# Altium PCB PCB_Propu2026.PcbDoc
Units mm, origin at the board's own origin, x right, y up, seen from the top; angles counter-clockwise.
Board outline 86.75 x 45 mm, 2 copper layers (Top Layer, Bottom Layer); 47 components, 27 nets, 139 pads, 3 vias.
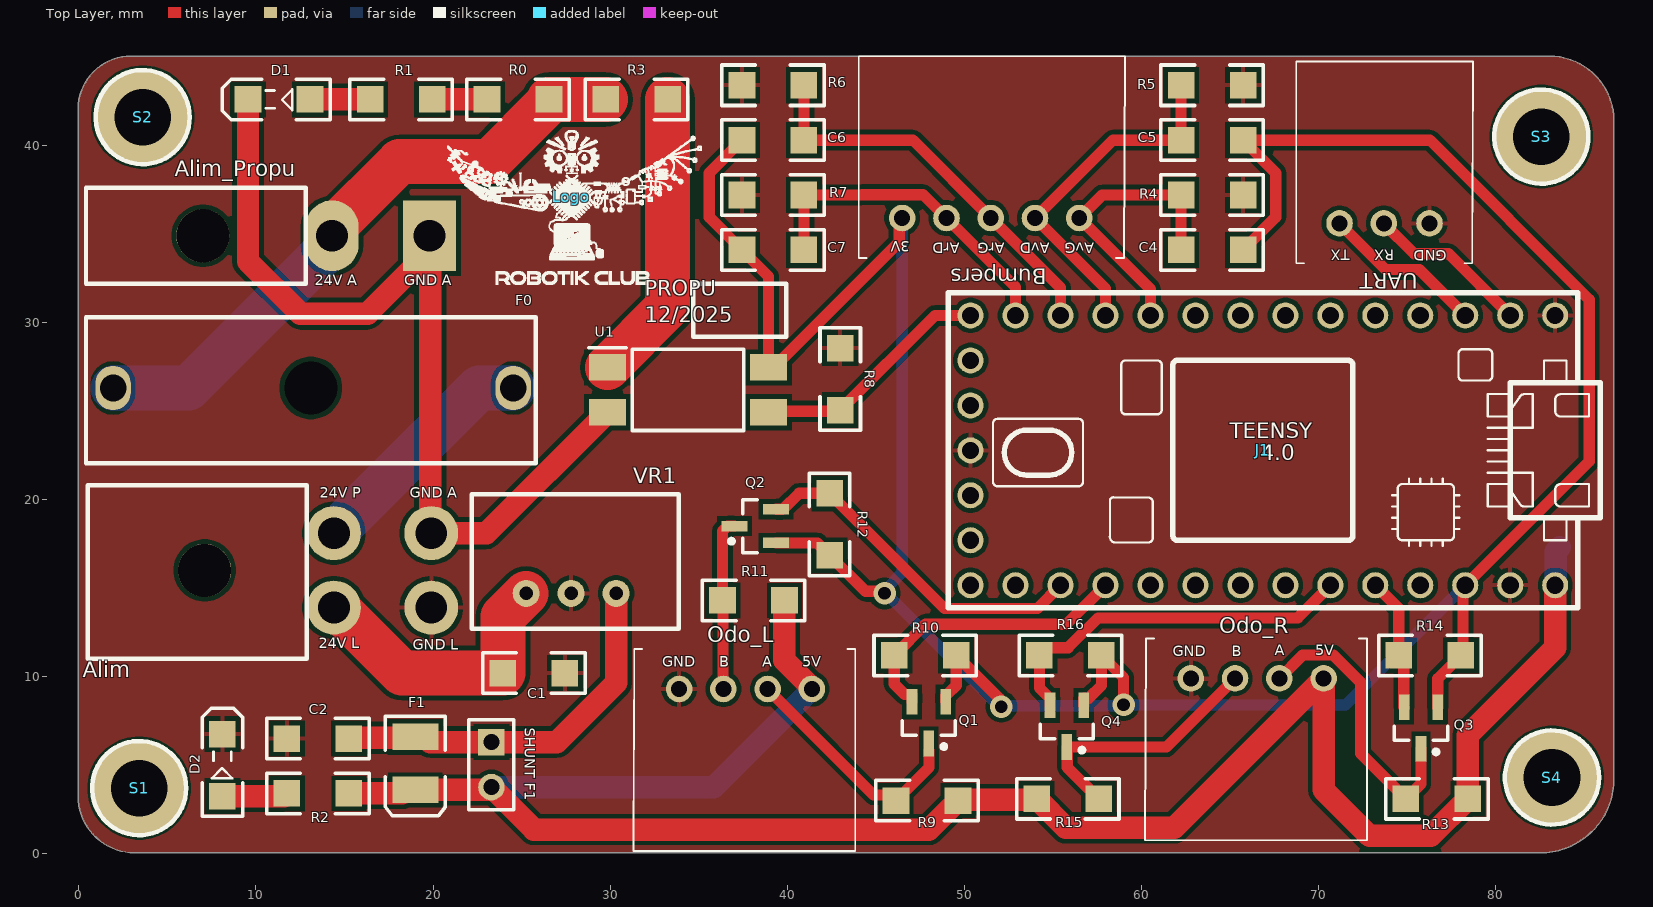
[diagram p0: Top Layer view]
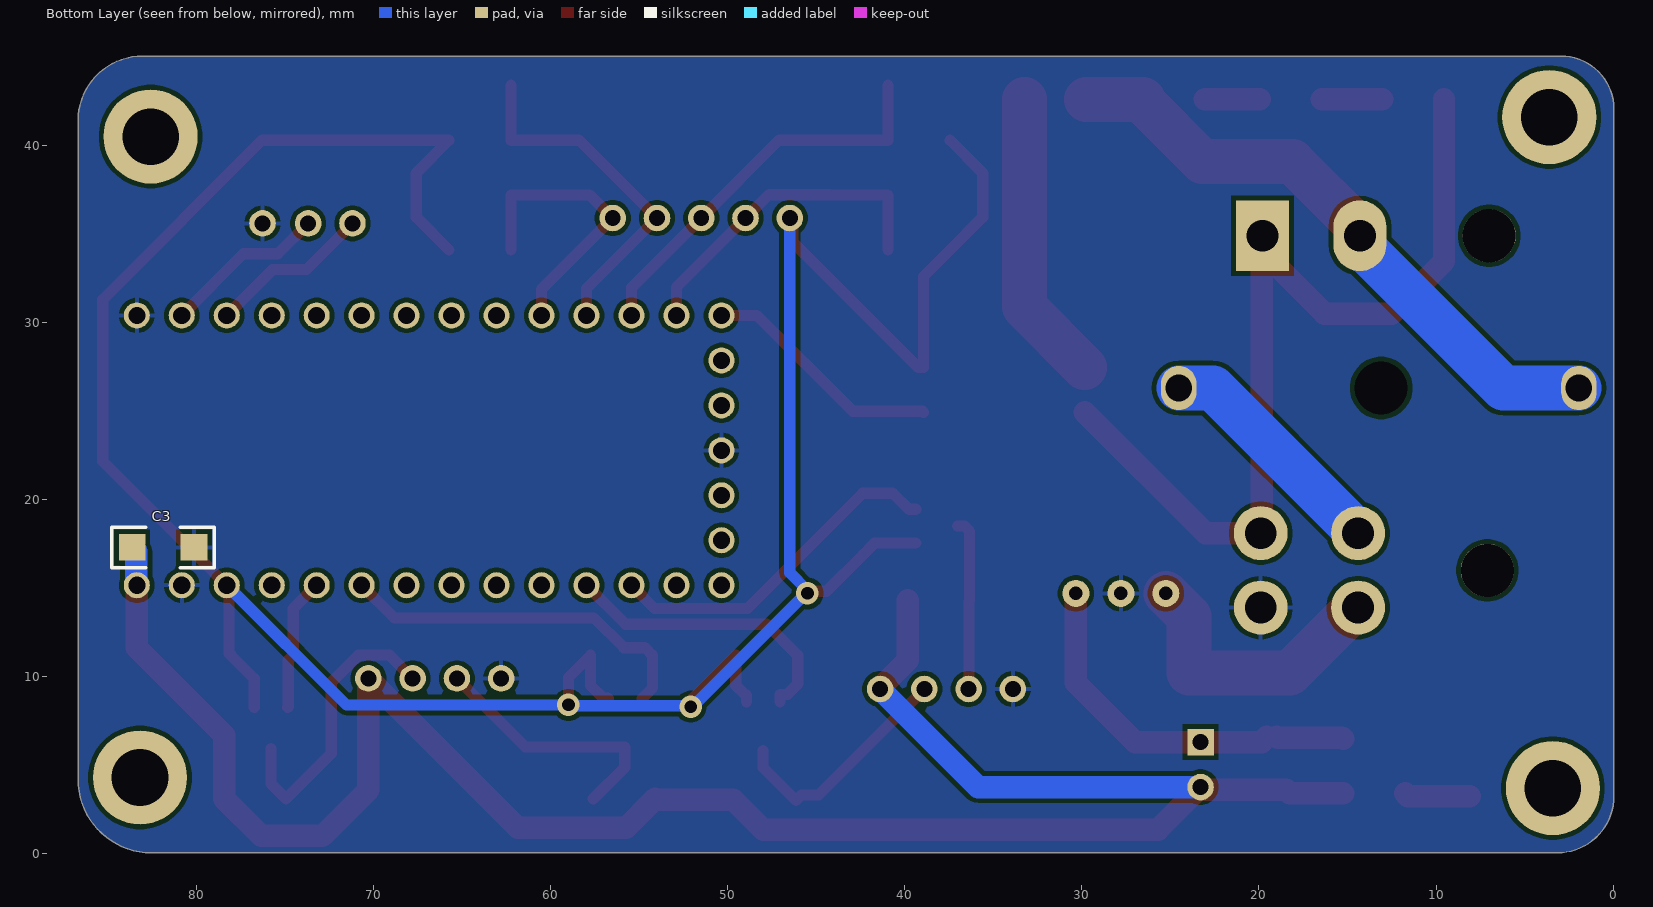
[diagram p1: Bottom Layer view, seen from below]

## Layer stack, top to bottom
Top Solder: solder mask 0.0102, Solder Resist, Dk 3.5
Top Layer: signal copper 0.0356
Dielectric 1: dielectric 0.32, FR-4, Dk 4.8
Bottom Layer: signal copper 0.0356
Bottom Solder: solder mask 0.0102, Solder Resist, Dk 3.5

## Board outline
-0.05,3.25 -0.05,42.05 cw(c2.95,42.05) 2.95,45.05 83.05,45.05 cw(c83.05,41.4) 86.7,41.4 86.7,4.2 cw(c82.55,4.2) 82.55,0.05 3.15,0.05 cw(c3.15,3.25)

## Design rules (kind name [scope] priority, off if disabled: settings)
Clearance [All] p1: gap=0.254 ignorepadtopadclearanceinfootprint=TRUE
PolygonConnect [All] p1: connectstyle=Relief reliefconductorwidth=0.254 reliefentries=4 polygonreliefangle="90 Angle" airgapwidth=0.254
RoutingVias [All] p1: holewidth=0.711 width=1.27 viastyle="Through Hole" minholewidth=0.711 minwidth=1.27 maxholewidth=0.711 maxwidth=1.27
SolderMaskExpansion [All] p1: expansion=0.102 istentingtop=FALSE
SupplyNets "Schematic Supply Nets_6" [InNet('GND_A')] p1: voltage=0.000
SupplyNets "Schematic Supply Nets_5" [InNet('GND_L')] p2: voltage=0.000
SupplyNets "Schematic Supply Nets_4" [InNet('24V_P')] p3: voltage=0.000
SupplyNets "Schematic Supply Nets_3" [InNet('5V_L')] p4: voltage=0.000
SupplyNets "Schematic Supply Nets_2" [InNet('24V_A')] p5: voltage=0.000
SupplyNets "Schematic Supply Nets_1" [InNet('24V_L')] p6: voltage=0.000
SupplyNets "Schematic Supply Nets" [InNet('3V_L')] p7: voltage=0.000
Width [All] p1: maxlimit=2.54 minlimit=0.254 preferedwidth=0.254 minimp=50.000000 maximp=50.000000 favimp=50.000000
30 further rules are at their usual default settings.

## Components (designator, comment, footprint, x,y, rotation, side; value= is the part's Value field where it differs from the comment)
Alim "MinifitJr 2X2H" MOLEX_MINIFITJR_2X2H 14.4,13.9 r270 top
Alim_Propu "MinifitJR 2H" Molex_MiniFitJr_2x1H 14.3,34.9 r180 top
Bumpers "Header 5H" S5B-XH-A 46.5,35.9 r0 top
C1 "" "Capacitor 1206" 25.7,10.2 r180 top value=10uF
C2 "(Optinal)" "Capacitor 1206" 13.5,6.5 r0 top value=10uF
C3 "(Optinal)" "Capacitor 1206" 81.9,17.3 r0 bottom value=10uF
C4 "Cap" "Capacitor 1206" 64,34.1 r0 top value=10nf
C5 "Cap" "Capacitor 1206" 64,40.3 r0 top value=10nf
C6 "Cap" "Capacitor 1206" 39.2,40.3 r180 top value=10nf
C7 "Cap" "Capacitor 1206" 39.2,34.1 r180 top value=10nf
D1 "A" KP-3216SEC 11.3,42.6 r180 top
D2 "L" KP-3216SEC 8.1,5 r90 top
F0 "10A max" Fuse 24.53,26.3 r180 top
F1 "500mA" 3.5X2.8X1.9 19,5.1 r270 top
J1 "TEENSY_4.0" TEENSY_4.0 66.87,22.78 r180 top
Logo "Comment" Logo_lowres 27.8,37.1 r0 top
Odo_L "JST XH 4" S4B-XH-A 41.4,9.3 r180 top
Odo_R "JST XH 4" S4B-XH-A 70.3,9.9 r180 top
Q1 "MOSFET-N" SOT23_M 48,7.4 r270 top
Q2 "MOSFET-N" SOT23_M 38.2,18.5 r180 top
Q3 "MOSFET-N" SOT23_M 75.8,7.1 r270 top
Q4 "MOSFET-N" SOT23_M 55.8,7.2 r270 top
R0 "Res2" "Resistor 1206" 24.8,42.6 r180 top value=1K1
R1 "Res2" "Resistor 1206" 18.2,42.6 r180 top value=1K1
R2 "Res2" "Resistor 1206" 13.5,3.4 r180 top value=300
R3 "Res2" "Resistor 1206" 31.5,42.6 r180 top value=1K2
R4 "Res2" "Resistor 1206" 64,37.2 r0 top value=10K
R5 "Res2" "Resistor 1206" 64,43.4 r0 top value=10K
R6 "Res2" "Resistor 1206" 39.2,43.4 r180 top value=10K
R7 "Res2" "Resistor 1206" 39.2,37.2 r180 top value=10K
R8 "Res2" "Resistor 1206" 43,26.8 r270 top value=10K
R9 "Res2" "Resistor 1206" 47.9,3 r0 top value=10K
R10 "Res2" "Resistor 1206" 47.8,11.2 r0 top value=10K
R11 "Res2" "Resistor 1206" 38.1,14.3 r0 top value=10K
R12 "Res2" "Resistor 1206" 42.4,18.6 r270 top value=10K
R13 "Res2" "Resistor 1206" 76.7,3.1 r0 top value=10K
R14 "Res2" "Resistor 1206" 76.3,11.2 r0 top value=10K
R15 "Res2" "Resistor 1206" 55.85,3.1 r180 top value=10K
R16 "Res2" "Resistor 1206" 56,11.2 r0 top value=10K
S1 "Screw M3" "Screw M3" 3.4,3.7 r0 top
S2 "Screw M3" "Screw M3" 3.6,41.6 r0 top
S3 "Screw M3" "Screw M3" 82.6,40.5 r0 top
S4 "Screw M3" "Screw M3" 83.2,4.3 r0 top
"SHUNT F1" "Header 2" HDR1X2 23.3,6.3 r270 top
U1 "FOD817S" SOP254P1016X385-4N 34.4,26.2 r0 top
UART "JST XH 3" S3B-XH-A 71.2,35.6 r0 top
VR1 "TSR 1-2450" TRS 25.26,14.7 r180 top

## Footprints (in the part's own frame and the unit in brackets; to place one, negate y for a bottom-side part, rotate by r counter-clockwise, add the part's x,y. Pads: shape width x height; smd on the part's side, far side on the other; paste and mask are expansions set on the pad)
3.5X2.8X1.9 [mm] "SM LED; 2 C-Bend Leads; Body 3.5 x 2.8 x 1.9 mm, inc leads (LxWxH typ)"
  rect 1.5x2.6 smd: 1(-1.5,0) 2(1.5,0)
  silkscreen extent -2.65,-1.7 2.95,1.7
"Capacitor 1206" [mm]
  rect 1.5x1.5 smd: 1(-1.75,0) 2(1.75,0)
  silkscreen extent -2.89,-1.14 2.89,1.14, body extent -1.97,-0.99 1.97,0.96, height 1.3
Fuse [mm] "Porte-fusible monté sur circuit 10 (UL) A, 6.3 (VDE) A, fusible Cartouche, 893-0574"
  round 2 hole 3: 0(11.43,0)
  oval 2x2.5 hole 1.5: 1(0,0) 2(22.6,0)
  silkscreen extent -1.27,-4 24.13,4.25, body extent -1.27,-4.29 24.13,4.29, height 11.41
HDR1X2 [mm] "Connector; Header; 2 Position"
  rect 1.5x1.5 hole 0.9: 1(0,0)
  round 1.5 hole 0.9: 2(2.54,0)
  silkscreen extent -1.27,-1.27 3.81,1.27
KP-3216SEC [mm]
  rect 1.5x1.5 smd: 1(-1.75,0) 2(1.75,0)
  silkscreen extent -2.89,-1.14 3.2,1.14, body extent -1.7,-0.79 1.5,0.81, height 1.1
Logo_lowres [mm]
  silkscreen extent -7.01,-4.93 7.39,3.76
Molex_MiniFitJr_2x1H [mm] "Connecteur Molex 2"
  rect 3x4 hole 1.8: 1(-5.5,0)
  oval 3x4 hole 1.8: 2(0,0)
  round 3 hole 3 unplated: 3(7.3,0)
  silkscreen extent 1.5,-2.7 13.9,2.7, body extent -6.03,-2.7 13.9,3.1, height 11.01
MOLEX_MINIFITJR_2X2H [mm] "MOLEX_MINIFITJR_3X2, 39-30-1060"
  round 3.048 hole 1.8: 1(-4.2,5.5) 2(-4.2,0) 3(0,5.5) 4(0,0)
  round 3 hole 3 unplated: 10(-2.1,-7.3)
  silkscreen extent -6.9,-13.9 2.9,-1.52, body extent -6.88,-13.9 3.12,6.03, height 11.4
"Resistor 1206" [mm]
  rect 1.5x1.5 smd: 1(-1.75,0) 2(1.75,0)
  silkscreen extent -2.89,-1.14 2.89,1.14, body extent -1.98,-0.95 1.98,0.93, height 0.55
S3B-XH-A [mm]
  round 1.5 hole 0.9: 1(0,0) 2(2.5,0) 3(5.08,0)
  silkscreen extent -2.45,-2.26 7.54,9.14, body extent -2.44,-2.27 7.46,9.23, height 6.15
S4B-XH-A [mm]
  round 1.5 hole 0.9: 1(0,0) 2(2.5,0) 3(5,0) 4(7.5,0)
  silkscreen extent -2.45,-2.26 10.08,9.14, body extent -2.44,-2.32 9.96,9.18, height 6.15
S5B-XH-A [mm]
  round 1.5 hole 0.9: 1(0,0) 2(2.5,0) 3(5,0) 4(7.5,0) 5(10,0)
  silkscreen extent -2.45,-2.26 12.58,9.14, body extent -2.45,-2.3 12.45,9.2, height 6.15
"Screw M3" [mm] "M3 iso Screw"
  round 5.32 hole 3.2 unplated: 0(0,0)
  silkscreen extent -2.66,-2.66 2.66,2.66
SOP254P1016X385-4N [mm]
  rect 2.1x1.5 smd: 1(-4.55,1.27) 2(-4.55,-1.27) 3(4.55,-1.27) 4(4.55,1.27)
  silkscreen extent -5.6,-2.3 3.15,2.37, body extent -5.08,-2.3 5.08,2.3, height 3.85
SOT23_M [mm] "SOT23, 3-Leads, Body 2.9x1.3mm, Pitch 0.95mm, Lead Span 2.3mm - Reverse Pinning, IPC Low Density"
  rect 1.45x0.6 smd: 1(1.175,0) 2(-1.175,-0.95) 3(-1.175,0.95)
  silkscreen extent -0.1,-1.5 1.47,1.5, body extent -0.7,-1.5 0.7,1.5, height 1.1
TEENSY_4.0 [mil]
  round 58 hole 38: 0/RX(-550,-300) 1/TX(-450,-300) 2(-350,-300) 3/CANTX(-250,-300) 3V3_LN(650,-100) 3V3_LO(-450,300) 4/CANRX(-150,-300) 5(-50,-300) 6(50,-300) 7(150,-300) 8(250,-300) 9/CS(350,-300) 10/CS(450,-300) 11/MOSI(550,-300) 12/MISO(650,-300) 13/SCK(650,300) 14/A0(550,300) 15/A1(450,300) 16/A2(350,300) 17/A3(250,300) 18/A4/SDA(150,300) 19/A5/SCL(50,300) 20/A6(-50,300) 21/A7(-150,300) 22/A8(-250,300) 23/A9(-350,300) GND(-650,-300) GND2(-550,300) GND3(650,0) ON/OFF(650,200) PROG(650,100) VBAT\(650,-200) VIN(-650,300)
  silkscreen extent -750,-350 700,350, body extent -728,-350 700,350, height 172
TRS [mil]
  round 60 hole 30: 1(0,0) 2(-100,0) 3(-200,0)
  silkscreen extent -340,-220 121,79, body extent -341,-218 120,80, height 398

## Part data
Alim: library part "Header 2X2H", "Header, 2-Pin, Dual row, Right Angle", LatestRevisionDate=17-Jul-2002, LatestRevisionNote="Re-released for DXP Platform.", Publisher="Altium Limited"
Alim_Propu: library part "Header 2", "Header, 2-Pin", LatestRevisionDate=17-Jul-2002, LatestRevisionNote="Re-released for DXP Platform.", Publisher="Altium Limited"
Bumpers: "Header, 5-Pin, Right Angle", LatestRevisionDate=17-Jul-2002, LatestRevisionNote="Re-released for DXP Platform.", Publisher="Altium Limited"
C1 C2 C3: library part Cap, "Capacitor", LatestRevisionDate=17-Jul-2002, LatestRevisionNote="Re-released for DXP Platform.", PackageDescription="Radial Cap, Thru-Hole; 2 Leads; 0.3 in Pin Spacing", PackageReference=RAD-0.3, Published=8-Jun-2000, Publisher="Altium Limited"
C4 C5 C6 C7: "Capacitor", LatestRevisionDate=17-Jul-2002, LatestRevisionNote="Re-released for DXP Platform.", PackageDescription="Radial Cap, Thru-Hole; 2 Leads; 0.3 in Pin Spacing", PackageReference=RAD-0.3, Published=8-Jun-2000, Publisher="Altium Limited"
D1 D2: library part LED2, "Typical RED, GREEN, YELLOW, AMBER GaAs LED", LatestRevisionDate=17-Jul-2002, LatestRevisionNote="Re-released for DXP Platform.", PackageDescription="SM LED; 2 Flat Leads", PackageReference=3.2X1.6X1.1, PackageVersion=Feb-2002, Published=8-Jun-2000, Publisher="Altium Limited"
F0: library part "Fuse 2", "Main Fuse", LatestRevisionDate=17-Jul-2002, LatestRevisionNote="Re-released for DXP Platform.", PackageDescription="Thru-Hole; 2 Leads", PackageReference=PIN-W2/E2.8, Published=8-Jun-2000, Publisher="Altium Limited"
F1: library part "Fuse 2", "Resettable Fuse αA / JF", LatestRevisionDate=17-Jul-2002, LatestRevisionNote="Re-released for DXP Platform.", PackageDescription="Thru-Hole; 2 Leads", PackageReference=PIN-W2/E2.8, Published=8-Jun-2000, Publisher="Altium Limited"
J1: Package=None, Check_prices=https://www.snapeda.com/parts/Teensy%204.0/PJRC/view-part/?ref=eda, MF=PJRC, MP="Teensy 4.0", SnapEDA_Link=https://www.snapeda.com/parts/Teensy%204.0/PJRC/view-part/?ref=snap
Odo_L Odo_R: library part "Header 4H", "Molex SPOX 4x1H", LatestRevisionDate=17-Jul-2002, LatestRevisionNote="Re-released for DXP Platform.", Publisher="Altium Limited"
Q1 Q2 Q3 Q4: "N-Channel MOSFET", LatestRevisionDate=17-Jul-2002, LatestRevisionNote="Re-released for DXP Platform.", PackageDescription="TO, Flat Index; 3 In-Line, Axial Leads; Body Dia. 4.6mm; Lead Dia. 0.5 mm (max)", PackageReference=E3, PackageVersion=1995/1996, Published=8-Jun-2000, Publisher="Altium Limited"
R0 R1 R2 R3 R4 R5 R6 R7 R8 R9 R10 R11 R12 R13 R14 R15 R16: "Resistor", LatestRevisionDate=17-Jul-2002, LatestRevisionNote="Re-released for DXP Platform.", PackageDescription="Axial Device, Thru-Hole; 2 Leads; 0.4 in Pin Spacing", PackageReference=AXIAL-0.4, Published=8-Jun-2000, Publisher="Altium Limited"
"SHUNT F1": "Header, 2-Pin", LatestRevisionDate=17-Jul-2002, LatestRevisionNote="Re-released for DXP Platform.", Publisher="Altium Limited"
U1: library part Optoisolator1, "4-Pin Phototransistor Optocoupler", DatasheetVersion=Nov-2003, LatestRevisionDate=04-Mar-2005, LatestRevisionNote="Sch pins 3 & 4 Swapped.", PackageReference=DIP-4, Published=24-Mar-1999, Publisher="Altium Limited"
UART: library part "Header 3H", "Header, 3-Pin, Right Angle", LatestRevisionDate=17-Jul-2002, LatestRevisionNote="Re-released for DXP Platform.", Publisher="Altium Limited"
VR1: library part "Volt Reg", "Voltage Regulator", LatestRevisionDate=29-May-2009, LatestRevisionNote="IPC-7351 Footprint Added.", PackageDescription="3-Pin Transistor Outline Package 2.54 mm Pitch, 15.1 mm Lead Span", PackageReference=D2PAK, Published=24-Mar-1999, Publisher="Altium Limited"

## Via types
v1: diameter 1.27, hole 0.711, Top Layer to Bottom Layer, 3 vias

## Nets (pads, with @x,y where several pads share a name; then routed paths per layer and width w, separated by ;. In a path a pad name is that pad's centre, name@x,y a point inside that pad or via, vN(x,y) a via of type N, cw(c..) or ccw(c..) an arc to the next point about the centre after c; other vN are vias at no path point)
3V_L: Bumpers.1 C4.2 C5.2 C6.2 C7.2 J1.3V3_LO Q1.3 Q2.3 Q3.3 Q4.3 R10.2 R12.2 R14.2 R16.2 U1.4 | length 165.1
  Top Layer w0.635: C6.2 35.6,38.45 35.6,35.95 C7.2 38.95,32.6 U1.4 39.25,27.47 46.334,34.554 46.334,35.734 Bumpers.1 ; Q2.3 41.7,17.55 R12.2 44.429,14.822 45.378,14.822 v1(45.5,14.7) ; Q1.3 48.95,8.965 48.968,8.982 49.035,8.982 49.55,9.497 R10.2 51.978,8.771 51.978,8.422 v1(52.1,8.3) ; Q4.3 56.75,8.765 56.768,8.782 57.035,8.782 57.75,9.497 R16.2 59,9.95 v1(59,8.4) ; C4.2 67.6,35.95 67.6,38.45 C5.2 76.3,40.3 85.3,31.3 85.3,22.16 78.175,15.035 78.175,11.325 R14.2 76.75,9.9 Q3.3
  Bottom Layer w0.635: Bumpers.1 46.5,15.872 45.5,14.872 v1(45.5,14.7) 45.6,14.7 52,8.3 v1(52.1,8.3) 52.15,8.35 58.95,8.35 v1(59,8.4) 71.54,8.4 J1.3V3_LO
5V_L: "SHUNT F1.2" C3.2 F1.2 J1.VIN Odo_L.1 Odo_R.1 R2.1 R9.2 R11.2 R13.2 R15.2 | length 119.9
  Top Layer w1.27: R2.1 18.25,3.4 18.45,3.6 F1.2 23.078,3.6 23.238,3.76 23.3,3.76 25.699,1.361 48.011,1.361 R9.2 49.7,3.05 54.05,3.05 R15.2 55.739,1.461 61.861,1.461 Odo_R.1 70.3,3.6 72.9,1 76.35,1 R13.2 78.45,6.695 83.38,11.625 J1.VIN ; R11.2 39.85,10.912 41.4,9.362 Odo_L.1
  Bottom Layer w1.27: 23.3,3.76 35.86,3.76 Odo_L.1 ; J1.VIN 83.419,15.199 83.419,17.069 C3.2
24V_A: Alim_Propu.2 F0.2 R0.1 R3.2 | length 35.2
  Top Layer w2.54: Alim_Propu.2 14.3,35.276 18.105,39.08 23.185,39.08 26.55,42.445 R0.1 R3.2
  Bottom Layer w2.54: F0.2 6.2,26.3 14.3,34.4 Alim_Propu.2
24V_L: Alim.4 C1.2 VR1.1 | length 16.1
  Top Layer w2.54: Alim.4 14.537,13.9 18.237,10.2 C1.2 23.95,13.39 VR1.1
24V_P: Alim.2 F0.1 | length 13.5
  Bottom Layer w2.54: Alim.2 22.6,26.3 F0.1
GND_A: Alim.1 Alim_Propu.1 D1.2 U1.2 | length 51
  Top Layer w1.27: D1.2 9.55,33.45 12.5,30.5 16.3,30.5 18.935,33.135 18.935,33.535 19.4,34 Alim_Propu.1@19.8,34 ; Alim_Propu.1@19.85,34 19.85,18.15 Alim.1 23.02,18.1 U1.2
GND_L: Alim.3 C1.1 C2.1 C3.1 D2.2 J1.GND J1.GND2 J1.GND3 Odo_L.4 Odo_R.4 R4.2 R5.2 R6.2 R7.2 R8.1 UART.3 VR1.2
NetC2_2: "SHUNT F1.1" C2.2 F1.1 VR1.3 | length 21.1
  Top Layer w1.27: C2.2 15.3,6.55 18.95,6.55 F1.1 ; F1.1@19.55,6.6 19.85,6.3 23.3,6.3 27,6.3 30.34,9.64 VR1.3
NetD1_1: D1.1 R1.2 | length 3.4
  Top Layer w1.27: D1.1 R1.2
NetD2_1: D2.1 R2.2 | length 3.7
  Top Layer w1.27: D2.1 11.6,3.25 R2.2
NetR0_2: R0.2 R1.1 | length 3.1
  Top Layer w1.27: R1.1 R0.2
NetR3_1: R3.1 U1.1 | length 16.5
  Top Layer w2.54: U1.1 33.25,30.87 R3.1
Odo_L_A: Odo_L.2 Q1.1 R9.1 | length 13.5
  Top Layer w0.635: Odo_L.2 44.886,3.314 45.836,3.314 R9.1 48.018,4.867 Q1.1@48.018,5.817
Odo_L_B: Odo_L.3 Q2.1 R11.1 | length 9.7
  Top Layer w0.635: Odo_L.3 36.375,9.325 36.375,14.275 R11.1 36.35,18.215 36.635,18.5 Q2.1
Odo_R_A: Odo_R.2 Q3.1 R13.1 | length 16.6
  Top Layer w0.635: Odo_R.2 69.122,11.222 70.847,11.222 72.4,9.669 72.4,5.65 R13.1 75.8,3.95 Q3.1
Odo_R_B: Odo_R.3 Q4.1 R15.1 | length 14.8
  Top Layer w0.635: R15.1 55.818,4.882 55.818,6.007 Q4.1 61.425,6.025 Odo_R.3
T_Bump_ArD: Bumpers.2 C7.1 J1.11/MOSI R7.1 | length 18.8
  Top Layer w0.635: C7.1 R7.1 44.204,37.2 44.226,37.222 47.678,37.222 Bumpers.2 52.9,32 J1.11/MOSI
T_Bump_ArG: Bumpers.3 C6.1 J1.10/CS R6.1 | length 22.6
  Top Layer w0.635: R6.1 C6.1 47.1,40.3 Bumpers.3 55.44,31.96 J1.10/CS
T_Bump_AvD: Bumpers.4 C5.1 J1.9/CS R5.1 | length 20.3
  Top Layer w0.635: J1.9/CS 57.98,31.92 Bumpers.4 58.4,40.3 C5.1 R5.1
T_Bump_AvG: Bumpers.5 C4.1 J1.8 R4.1 | length 16.6
  Top Layer w0.635: J1.8 60.52,31.88 Bumpers.5 57.8,37.2 R4.1 C4.1
T_Odo_L_A: J1.16/A2 Q1.2 R10.1 | length 16.8
  Top Layer w0.635: Q1.2 47.05,8.965 47.033,8.983 46.643,8.983 46.05,9.575 R10.1 47.813,12.963 55.783,12.963 J1.16/A2
T_Odo_L_B: J1.15/A1 Q2.2 R12.1 | length 19.7
  Top Layer w0.635: Q2.2 39.765,19.45 40.665,20.35 R12.1 48.898,13.852 54.132,13.852 J1.15/A1
T_Odo_R_A: J1.22/A8 Q3.2 R14.1 | length 7.6
  Top Layer w0.635: J1.22/A8 74.55,13.83 R14.1 74.833,10.918 74.833,8.293 Q3.2
T_Odo_R_B: J1.21/A7 Q4.2 R16.1 | length 21.1
  Top Layer w0.635: Q4.2 54.85,8.765 54.25,9.365 R16.1 54.683,11.633 55.874,11.633 57.558,13.316 68.836,13.316 J1.21/A7
T_RX1: J1.0/RX UART.2 | length 9.3
  Top Layer w0.635: UART.2 75.414,33.886 77.354,33.886 J1.0/RX
T_Sense_Propu: J1.12/MISO R8.2 U1.3 | length 13.7
  Top Layer w0.635: U1.3 39.01,24.99 42.94,24.99 R8.2 48.35,30.4 J1.12/MISO
T_TX1: J1.1/TX UART.1 | length 9.3
  Top Layer w0.635: UART.1 73.803,32.997 75.703,32.997 J1.1/TX
pads on no net: Alim.10 Alim_Propu.3 F0.0 J1.2 J1.3/CANTX J1.3V3_LN J1.4/CANRX J1.5 J1.6 J1.7 J1.13/SCK J1.14/A0 J1.17/A3 J1.18/A4/SDA J1.19/A5/SCL J1.20/A6 J1.23/A9 J1.ON/OFF J1.PROG J1.VBAT\ S1.0 S2.0 S3.0 S4.0

## Polygon pours and split planes (outlines as drawn)
GND_L on Top Layer "GND_L_L01_P000" (solid, remove dead copper, pour order 0): -0.05,3.25 -0.05,42.05 cw(c2.95,42.05) 2.95,45.05 83.05,45.05 cw(c83.05,41.4) 86.7,41.4 86.7,4.2 cw(c82.55,4.2) 82.55,0.05 3.15,0.05 cw(c3.15,3.25)
GND_L on Bottom Layer "GND_L_L02_P001" (solid, remove dead copper, pour order 1): -0.05,3.25 -0.05,42.05 cw(c2.95,42.05) 2.95,45.05 83.05,45.05 cw(c83.05,41.4) 86.7,41.4 86.7,4.2 cw(c82.55,4.2) 82.55,0.05 3.15,0.05 cw(c3.15,3.25)

## Silkscreen, mask and mechanical layers (free items; w line width, h text height)
Top Overlay:
  lines w0.254: 34.7,29.2 39.95,29.2 39.95,32.2 34.7,32.2 34.7,29.2
  text "3V" at 46.933,34.789 h1.02 r180
  text "ArD" at 49.76,34.7 h1.02 r180
  text "ArG" at 52.28,34.689 h1.02 r180
  text "AvD" at 54.835,34.7 h1.02 r180
  text "AvG" at 57.356,34.689 h1.02 r180
  text "TX" at 71.766,34.3 h1.02 r180
  text "RX" at 74.292,34.3 h1.02 r180
  text "GND" at 77.261,34.289 h1.02 r180
  text "24V A" at 13.326,31.9 h1.02
  text "GND A" at 18.386,31.911 h1.02
  text "PROPU / 12/2025" at 31.952,29.7 h1.5
  text "24V P" at 13.596,19.9 h1.02
  text "GND A" at 18.686,19.911 h1.02
  text "24V L" at 13.542,11.4 h1.02
  text "GND L" at 18.852,11.311 h1.02
  text "5V" at 69.817,11.011 h1.02
  text "A" at 67.546,11 h1.02
  text "GND" at 61.789,10.961 h1.02
  text "B" at 65.105,10.95 h1.02
  text "GND" at 32.939,10.361 h1.02
  text "B" at 36.155,10.35 h1.02
  text "A" at 38.596,10.35 h1.02
  text "5V" at 40.867,10.361 h1.02
Mechanical 1:
  lines w0.254: -0.05,3.04 ccw(c2.94,3.04) 2.94,0.05 82.822,0.05 ccw(c82.686,4.064) 86.7,4.2 86.7,41.4 ccw(c83.05,41.4) 83.05,45.05 2.753,45.05 ccw(c2.852,42.148) -0.05,42.05 -0.05,3.04

## Text inside footprints (layer, text, board x,y; h text height)
J1: Top Overlay "TEENSY" at 65.01,23.16 h1.52; Top Overlay "4.0" at 66.76,21.91 h1.52